# Altium PCB Termo_DISPLAY_CPU_10_1.PcbDoc (part 1 of 2)
Units mil, origin at the board's own origin, x right, y up, seen from the top; angles counter-clockwise.
Board outline 3356.49 x 1466.72 mil, 2 copper layers (Top Layer, Bottom Layer); 43 components, 32 nets, 183 pads, 62 vias.
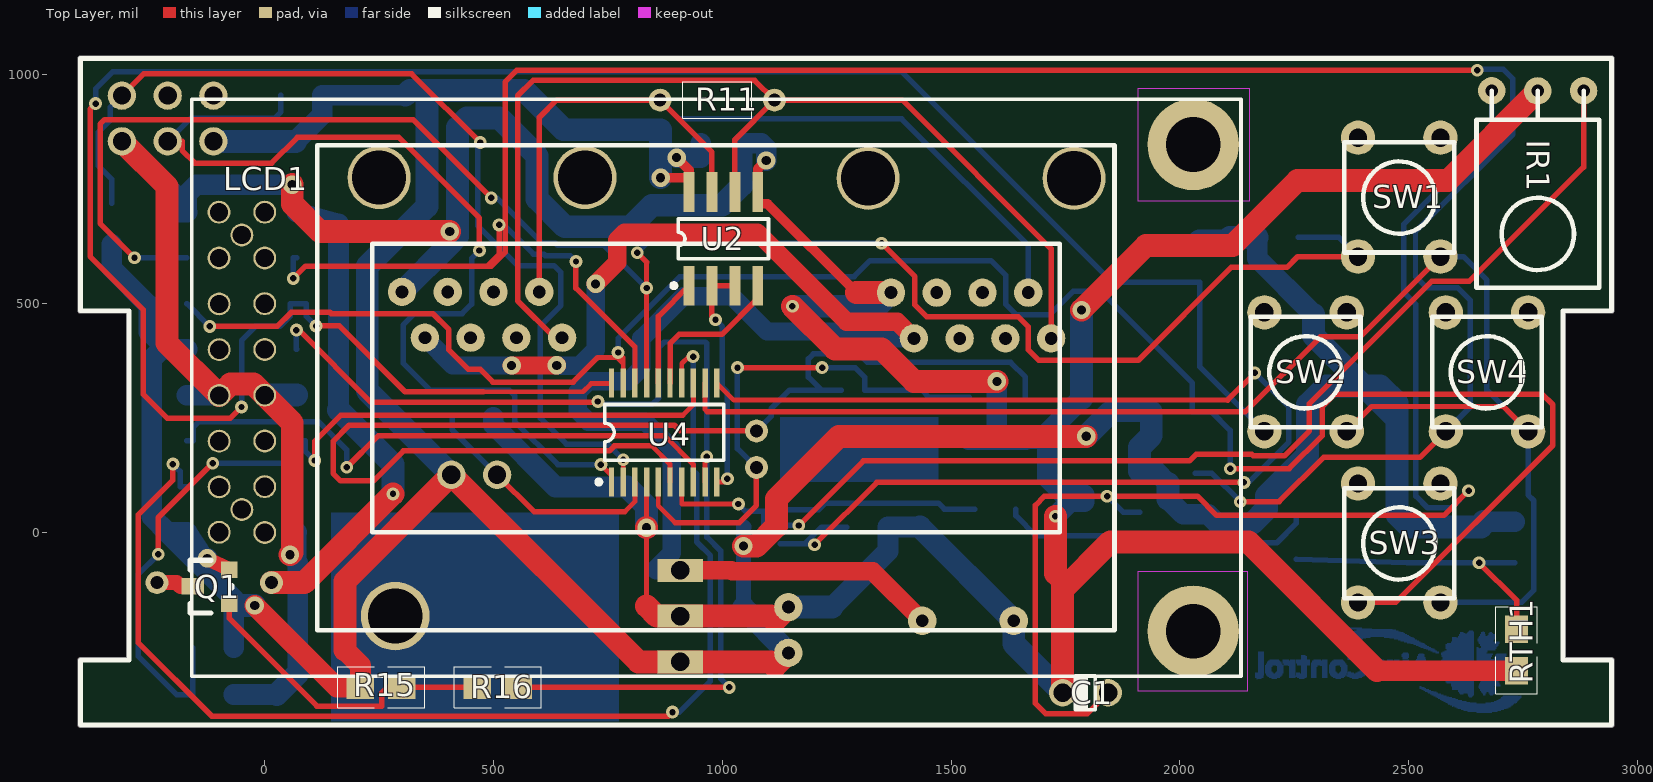
[diagram p0: Top Layer view]
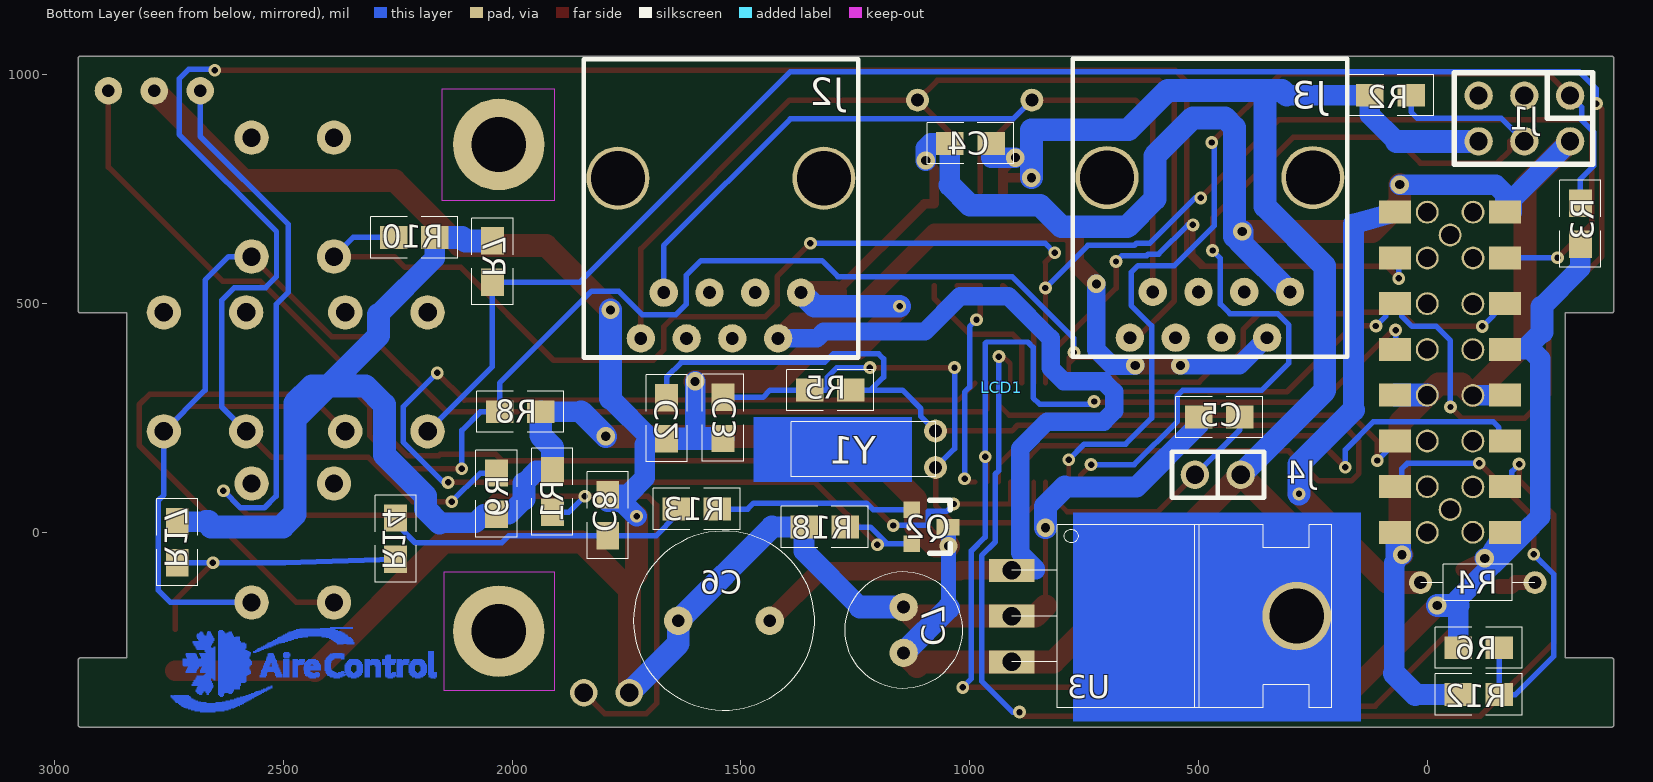
[diagram p1: Bottom Layer view, seen from below]

## Layer stack, top to bottom
Top Layer: signal copper 1.4
Dielectric: dielectric 12.6, FR-4, Dk 4.8
Bottom Layer: signal copper 1.4

## Board outline
-407.76,-420.76 ccw(c-402.75,-420.76) -402.75,-425.78 2943.71,-425.78 ccw(c2943.71,-420.76) 2948.73,-420.76 2948.73,-279.03 ccw(c2943.71,-279.03) 2943.71,-274.01 2842.43,-274.01 2842.43,479.74 2943.71,479.74 ccw(c2943.71,484.75) 2948.73,484.75 2948.73,1035.93 ccw(c2943.71,1035.93) 2943.71,1040.95 -402.75,1040.95 ccw(c-402.75,1035.93) -407.76,1035.93 -407.76,484.75 ccw(c-402.75,484.75) -402.75,479.74 -301.46,479.74 -301.46,-274.01 -402.75,-274.01 ccw(c-402.75,-279.03) -407.76,-279.03

## Design rules (kind name [scope] priority, off if disabled: settings)
Clearance via-via [(IsVia) vs (IsVia)] p1: gap=10
Clearance C_LCD1 [(IsPad AND InComponent('LCD1')) vs (IsPad AND InComponent('LCD1'))] p2: gap=10
Clearance [All] p3: gap=10
FabricationTestPointUsage TestPointUsage [All] p1: valid=0 allowmultiple=FALSE
FabricationTestpoint Testpoint [All] p1: side=3 testpointundercomponent=TRUE minsize=40 maxsize=100 preferedsize=60 minholesize=0 maxholesize=40 preferedholesize=32 testpointgrid=1 allowsidetop=TRUE allowsidebottom=TRUE usegrid=TRUE gridtolerance=0.01
PolygonConnect [All] p1: connectstyle=Relief reliefconductorwidth=10 reliefentries=4 polygonreliefangle="90 Angle"
RoomDefinition Termo_DISPLAY_CPU_01 [InComponentClass('Termo_DISPLAY_CPU_01')] p1: confinementstyle=ConfineIn formatcopy=TRUE lockcomponents=FALSE outline -467.75,-465.76 3087.25,-465.76 3087.25,1074.24 -467.75,1074.24
RoutingCorners [All] p1: cornerstyle=45-Degree minsetback=100 maxsetback=10
RoutingVias V_5V [InNet('+5V')] p1: holewidth=20 width=40 viastyle="Through Hole" minholewidth=20 minwidth=40 maxholewidth=20 maxwidth=40
RoutingVias V_gnd [InNet('GND POWER')] p2: holewidth=20 width=40 viastyle="Through Hole" minholewidth=20 minwidth=40 maxholewidth=20 maxwidth=40
RoutingVias V_19V [InNet('+19V')] p3: holewidth=20 width=40 viastyle="Through Hole" minholewidth=20 minwidth=40 maxholewidth=20 maxwidth=40
RoutingVias [All] p4: holewidth=14 width=28 viastyle="Through Hole" minholewidth=14 minwidth=28 maxholewidth=14 maxwidth=28
SMDNeckDown [All] p1: percent=90.000
SMDToCorner [All] p1: distance=100000
SMDToPlane [All] p1: distance=160000
SilkscreenOverComponentPads [All] p1: minsilkscreentomaskgap=10
SolderMaskExpansion [All] p1: expansion=4
Width W_LCD_bkl [(InNet('NetLCD1_15') OR InNet('NetQ1_CD'))] p1: maxlimit=100 minlimit=10 preferedwidth=50
Width W_LCD [InNet('NetLCD1_15')] p2: maxlimit=100 minlimit=10 preferedwidth=50
Width W_GND [InNet('GND POWER')] p3: maxlimit=100 minlimit=10 preferedwidth=50
Width W_5V [InNet('+5V')] p4: maxlimit=80 minlimit=10 preferedwidth=50
Width W_12V [InNet('+19V')] p5: maxlimit=100 minlimit=10 preferedwidth=40
Width [All] p6: maxlimit=16 minlimit=7 preferedwidth=12
24 further rules are at their usual default settings.

## Classes and differential pairs
pad class U2_pads: U2-1 U2-2 U2-3 U2-4 U2-5 U2-6 U2-7 U2-8 U2-9 U2-10 U2-11 U2-12 U2-13 U2-14 U2-15 U2-16 U2-17 U2-18 U2-19 U2-20 U2-21 U2-22 U2-23 U2-24 U2-25 U2-26 U2-27 U2-28 U2-29 U2-30 U2-31 U2-32 U2-33 U2-34 U2-35 U2-36 U2-37 U2-38 U2-39 U2-40 U2-41 U2-42 U2-43 U2-44 U2-45 U2-46 U2-47 U2-48 U2-49 U2-50 U2-51 U2-52 U2-53 U2-54 U2-55 U2-56 U2-57 U2-58 U2-59 U2-60 U2-61 U2-62 U2-63 U2-64

## Components (designator, comment, footprint, x,y, rotation, side; value= is the part's Value field where it differs from the comment)
C1 "10uT" Dio_4007_Vert 1843.62,-350.39 r180 top
C2 "22p" 0805 1661.42,204.72 r90 bottom
C3 "22p" 0805 1538.37,205.28 r90 bottom
C4 "0.1u" 0805 1043.31,849.39 r180 bottom
C5 "0.1u" 0805 499.45,250.97 r180 bottom
C6 "330/16" 330x16 1537.01,-192.91 r0 bottom
C7 "10/6" 10X16 1144.5,-213.33 r90 bottom
C8 "0.1u" 0805 1790.34,-7.32 r90 bottom
IR1 "IRM8601S" IRM8601S 2916.15,902.07 r180 top
J1 "BDM Port" JBDM -312.2,954.83 r0 bottom
J2 "CON_RJ-45" RJ-45V 1318.91,774.12 r0 bottom locked
J3 "CON_RJ-45" RJ-45V 250.01,775.7 r0 bottom locked
J4 "JMP" JUMP_1 508.37,125.56 r180 bottom
LCD1 "HC200401C-VB" FDC0802B_SSMPTH 0,0 r0 top locked
Q1 "TMS2311P" SOT-23-BM -77.48,-156.11 r90 top
Q2 "BC547C" SOT-23 1127.24,49.81 r270 bottom
R1 "47" 0805 1913.21,134.36 r270 bottom
R2 "4K7" 0805 35.43,956.69 r0 bottom
R3 "4K7" 0805 -333.65,719.92 r270 bottom
R4 "100" SFR16 -235.42,-109.74 r0 bottom
R5 "3M" 0805 1259.84,312.02 r0 bottom
R6 "10K" 0805 -67.48,-252.97 r180 bottom
R7 "33K" 0805 2044.31,637.24 r270 bottom
R8 "33K" 0805 1937.56,264.78 r0 bottom
R9 "33K" 0805 2033.26,39.87 r90 bottom
R10 "33K" 0805 2169.29,645.67 r0 bottom
R11 "600" SFR16 1114.17,944.88 r180 top
R12 "1K" 0805 -67.48,-355.33 r180 bottom
R13 "10K" 0805 1551.73,52.18 r0 bottom
R14 "10K" 0805 2255.91,31.5 r270 bottom
R15 "10K" 0805 209.21,-339.58 r0 top
R16 "1K" 0805 554.57,-337.58 r180 top
R17 "15K" 0805 2731.28,-66.38 r90 bottom
R18 "1K" 0805 1272.21,12.81 r0 bottom
RTH1 "10K" 0805 2735.05,-212.1 r270 top
SW1 "MSW" Switch_1 2479.69,731.86 r0 top
SW2 "MSW" Switch_1 2274.97,349.97 r0 top
SW3 "MSW" Switch_1 2479.69,-24.04 r0 top
SW4 "MSW" Switch_1 2671.51,349.97 r0 top
U2 "SN75176A / DS36277" M08A 1001.87,642.6 r0 top
U3 "LM7805" LM78XX 908.28,-182.96 r270 bottom
U4 "MC9S08SH4 (TSSOP20)" TSSOP20 873.03,218.5 r0 top locked
Y1 "32.768 KHz" X32768 1074.8,222.23 r270 bottom

## Footprints (in the part's own frame and the unit in brackets; to place one, negate y for a bottom-side part, rotate by r counter-clockwise, add the part's x,y. Pads: shape width x height; smd on the part's side, far side on the other; paste and mask are expansions set on the pad)
10X16 [mil]
  round 62 hole 28: 1(-49.95,0) 2(50.05,0)
  silkscreen extent -128,-128 128,128
330x16 [mil]
  round 62 hole 28: 1(-100,0) 2(100,0)
  silkscreen extent -197,-197 197,197
0805 [mil]
  rect 60x50 smd: 1(0,1) 2(90,1)
  silkscreen extent -50,-44 140,46
Dio_4007_Vert [mil]
  round 60 hole 40: 1(0,0) 2(99.53,0)
  silkscreen extent 28,-37 75,37
FDC0802B_SSMPTH [mil]
  round 50 hole 40: 0(-100,600) 0(-100,700) 0(-99.6,0.5) 0(-99.6,99.5) 0(-99.6,199.5) 0(-99.6,299.5) 0(-99.6,399.5) 0(-99.6,499.5) 0(-50,50) 0(-50,650) 0(0,0) 0(0,100) 0(0,200) 0(0,300) 0(0,400) 0(0,500) 0(0,600) 0(0,700)
  round 10 on Top Overlay: 0(-60.19,-216.07) 0(-60.19,847.98)
  rect 240x120 on Mech1: 0(460.4,-134.5) 0(460.4,765.5) 0(1515.4,-134.5) 0(1515.4,765.5)
  round 200 hole 120: 0(2029.38,-216.07) 0(2029.38,847.98)
  rect 70x50 smd far side: 1(70,0) 2(-170,0) 3(70,100) 4(-170,100) 5(70,200) 6(-170,200) 7(70,300) 8(-170,300) 9(70,400) 10(-170,400) 11(70,500) 12(-170,500) 13(70,600) 14(-170,600) 15(70,700) 16(-170,700)
  silkscreen extent -160,-314 2134,946
IRM8601S [mm]
  round 1.524 hole 0.7: 1(0.85,-1.61) 2(3.4,-1.6) 3(5.95,-1.61)
  silkscreen extent -0.01,-1.61 6.8,9.33
JBDM [mil]
  round 62 hole 40: 1(0,0) 2(0,100) 3(100,0) 4(100,100) 5(200,0) 6(200,100)
  silkscreen extent -50,-50 253,150
JUMP_1 [mil]
  round 62 hole 40: 1(0.5,0.42) 2(100.5,0.42)
  silkscreen extent -49,-50 152,50
LM78XX [mil]
  round 150 hole 120: 0(-0.16,623)
  rect 50x100 hole 40: 1(-100,0) 2(100,0) 3(0,0)
  silkscreen extent -200,0 200,700
M08A [mm]
  rect 0.6x2.2 smd: 1(-1.887,-2.622) 2(-0.617,-2.622) 3(0.653,-2.622) 4(1.923,-2.622) 5(1.923,2.578) 6(0.653,2.578) 7(-0.617,2.578) 8(-1.887,2.578)
  silkscreen extent -2.86,-2.75 2.52,1.08
RJ-45V [mil] "Montaje Vertical"
  round 62 hole 28: 1(400,350) 2(350,250) 3(300,350) 4(250,250) 5(200,350) 6(150,250) 7(100,350) 8(50,250)
  round 137.8 hole 118.11: Gnd(0,0) Gnd(450,0)
  silkscreen extent -75,-260 525,392
SFR16 [mil]
  round 50 hole 28: 1(0,0) 2(250,0)
  silkscreen extent 0,-40 250,40
SOT-23 [mil]
  rect 36x36 smd: B(0,0) E(75,0)
  rect 36x50 smd: C(38,80)
  silkscreen extent -20,-5 95,85
SOT-23-BM [mil]
  rect 36x36 smd: BG(0,0) ES(75,0)
  rect 36x50 smd: CD(38,80)
  silkscreen extent -20,-5 95,85
Switch_1 [mil]
  round 75 hole 40: 1(90,-129) 2(-90,-129) 3(-90,131) 4(90,131)
  silkscreen extent -120,-120 120,121
TSSOP20 [mm] "Shrink Small Outline; 20 Leads; Body Width 4.4 mm; Pitch 0.65 mm"
  rect 0.3x1.6 smd: 1(-2.925,-2.75) 2(-2.275,-2.75) 3(-1.625,-2.75) 4(-0.975,-2.75) 5(-0.325,-2.75) 6(0.325,-2.75) 7(0.975,-2.75) 8(1.625,-2.75) 9(2.275,-2.75) 10(2.925,-2.75) 11(2.925,2.75) 12(2.275,2.75) 13(1.625,2.75) 14(0.975,2.75) 15(0.325,2.75) 16(-0.325,2.75) 17(-0.975,2.75) 18(-1.625,2.75) 19(-2.275,2.75) 20(-2.925,2.75)
  silkscreen extent -3.75,-2.87 3.3,1.55
X32768 [mil]
  round 50 hole 28: 1(80.5,0) 2(0.5,0)
  silkscreen extent -19,-315 101,0

## Part data
C1: library part CAPACITOR
C2 C3 C4 C5 C8: library part CAP_MINI_NPOL
C6: library part 330X16
C7: library part 10X16
IR1: "Sensor IR"
J1: library part JBDM
J4: library part JUMP_1
LCD1: library part LCD_2X20_01, "12864"
Q1: library part MOSFET_P
Q2: library part NPN, "NPN Bipolar Transistor"
R1: library part RES1
R2 R3 R4: library part R
R5 RTH1: library part RESISTOR
R6 R7 R8 R9 R10 R11 R12 R13 R14 R15 R16 R17 R18: library part RCHICA
SW1 SW2 SW3 SW4: library part SWITCH_1
U2: library part SN75176A, "Low-Voltage Audio Power Amplifier"
U3: library part LM78XX
U4: library part MC9S08SH8_20
Y1: library part CRYSTAL

## Via types
v1: diameter 28, hole 14, Top Layer to Bottom Layer, 46 vias
v2: diameter 40, hole 20, Top Layer to Bottom Layer, 16 vias

## Nets (pads, with @x,y where several pads share a name; then routed paths per layer and width w, separated by ;. In a path a pad name is that pad's centre, name@x,y a point inside that pad or via, vN(x,y) a via of type N, cw(c..) or ccw(c..) an arc to the next point about the centre after c; other vN are vias at no path point)
+5V: C4.2 C7.1 J1.6 J4.2 LCD1.2 LCD1.10 Q1.ES Q2.C R1.1 R2.2 R3.2 R6.1 R7.1 R8.1 R9.1 R10.1 R15.1 R17.2 U2.8 U3.2 | length 9429.8
  Top Layer w21.26: v2(865.25,775.24) U2.8@927.56,775.24 ; v2(900.25,819.24) 927.56,791.93 U2.8@927.56,775.24 ; U2.8@927.56,744.09 U2.8@927.56,775.24
  Top Layer w32.4: v2(-125.75,-56.76) Q1.ES@-77.48,-81.11
  Top Layer w45: v2(-21.72,-159.76) 157.1,-338.58 R15.1@209.21,-338.58 209.21,-290.76 175.25,-256.8
  Top Layer w50: 175.25,-256.8 175.25,-106.64 J4.2@407.87,125.98 816.82,-282.96 U3.2@908.28,-282.96 1105.25,-282.96 1115.03,-292.74 C7.1@1144.5,-263.28 ; v2(1046.25,-29.76) 1075.25,-29.76 1118.25,13.24 1118.25,73.24 1255.1,210.08 v2(1795.7,210.08)
  Bottom Layer w32.4: 1046.25,-165.04 v2(1046.25,-29.76) 1046.25,11.81 Q2.C@1047.24,11.81
  Bottom Layer w45: R3.2@-334.65,629.92 -334.65,577.24 -250.75,493.34 ; -250.75,438 -212.75,400 ; LCD1.10@-170,400 -212.75,400 ; v2(-125.75,-56.76) -129.69,-60.71 -130.12,-60.15 -132.75,-56.76 LCD1.2@-170,0 -212.75,0 ; R6.1@-67.48,-251.97 -67.48,-159.76 -67.48,-145.27 -212.75,0 ; 67.25,854.83 125.43,913.01 R2.2@125.43,955.69 307.25,955.69 ; v2(900.25,819.24) 953.31,819.24 C4.2@953.31,850.39 ; 1849.4,263.78 R8.1@1937.56,263.78 ; R1.1@1912.21,134.36 1947.25,134.36 1974.06,107.55 ; 1974.06,73.06 2007.25,39.87 R9.1@2034.26,39.87 2061.86,39.87 2080.99,20.74 2159.25,20.74 ; R10.1@2169.29,644.67 2169.29,599.24 2292.25,476.28 ; 2663.92,23.62 2669.64,23.62 R17.2@2732.28,23.62 ; -212.75,0 -247.25,34.5 -247.25,379.24 -226.49,400 -212.75,400
  Bottom Layer w50: -250.75,438 -250.75,493.34 ; J1.6@-112.19,854.83 67.25,854.83 ; -67.48,-159.76 v2(-21.72,-159.76) ; 307.25,955.69 317.8,966.24 354.25,966.24 ; J4.2@407.87,125.98 224.01,309.85 224.01,582 354.25,712.24 354.25,966.24 ; v2(865.25,775.24) 865.25,879.39 864.4,880.24 653.25,880.24 567.25,966.24 354.25,966.24 ; 1046.25,-165.04 C7.1@1144.5,-263.28 ; v2(1795.7,210.08) 1849.4,263.78 ; R1.1@1912.21,134.36 1912.21,186.24 1937.56,211.59 R8.1@1937.56,263.78 ; 1974.06,73.06 1974.06,107.55 ; R7.1@2043.31,637.24 2102.25,637.24 2109.68,644.67 R10.1@2169.29,644.67 ; 2159.25,20.74 2189.25,50.74 2189.25,79.24 2279.47,169.46 2279.47,279.24 2320.47,320.24 2402.25,320.24 ; 2292.25,476.28 2292.25,430.24 2402.25,320.24 ; 2663.92,23.62 2652.76,12.46 2504.98,12.46 2475.2,42.24 2475.2,283.3 2438.25,320.24 2402.25,320.24 ; 2669.64,23.62 2658.25,12.24 2501.25,12.24 2474.25,39.24 2474.25,248.24 2402.25,320.24
+19V: C6.1 J2.7 J3.7 U3.1 | length 3510.7
  Top Layer w40: v2(539.71,364.7) 637.71,364.7 v2(638.25,365.24) ; v2(723.25,543.24) 770.25,590.24 770.25,639.24 786.25,655.24 1077.25,655.24 1271.72,460.78 1382.25,460.78 J2.7@1418.91,424.12 ; U3.1@908.28,-82.96 1019.81,-82.96 1021.6,-84.76 1328.85,-84.76 C6.1@1437.01,-192.91
  Bottom Layer w40: J3.7@350.01,425.7 411.01,364.7 v2(539.71,364.7) ; v2(638.25,365.24) 639.25,364.24 688.25,364.24 723.25,399.24 v2(723.25,543.24) ; U3.1@908.28,-82.96 855.25,-82.96 855.25,-79.47 889.64,-45.08 889.64,183.3 830.7,242.24 707.25,242.24 684.25,265.24 684.25,307.24 707.25,330.24 794.25,330.24 823.25,359.24 823.25,424.24 915.25,516.24 1021.25,516.24 1098.25,439.24 1319.14,439.24 1334.25,424.12 J2.7@1418.91,424.12
"GND POWER": C1.2 C2.1 C3.1 C4.1 C5.1 C6.2 C7.2 C8.2 IR1.2 J1.2 J2.8 J3.8 LCD1.0@0,300 LCD1.0@-99.6,299.5 LCD1.1 LCD1.7 LCD1.8 LCD1.16 R12.1 R18.2 RTH1.2 U2.5 U3.3 U4.4 | length 11017
  Top Layer w10.63: 834.64,-160.76 834.64,10.63 U4.4@834.64,110.24
  Top Layer w21.26: v2(1096.25,812.93) 1077.56,794.24 U2.5@1077.56,744.09 1077.56,718.24 1099.25,718.24 1293.37,524.12
  Top Layer w45: 2431.29,-302.1 RTH1.2@2736.05,-302.1
  Top Layer w50: J1.2@-312.19,854.83 -213.75,756.38 -213.75,413.65 LCD1.0@-99.6,299.5 -74.86,324.23 -24.23,324.23 LCD1.0@0,300 60.25,239.75 60.25,-43.76 v2(55.25,-48.76) ; v2(60.25,760.24) 60.25,718.24 120.94,657.56 v2(404.25,657.56) ; v2(834.25,10.24) v2@834.64,10.63 ; 834.64,-160.76 856.85,-182.96 U3.3@908.28,-182.96 1105.25,-182.96 1115.03,-192.74 C7.2@1144.5,-163.28 ; v1(1153.25,494.24) 1246.25,401.24 1348.25,401.24 1419.25,330.24 v2(1600.25,330.24) ; 1293.37,524.12 J2.8@1368.91,524.12 ; v1(1728.25,35.24) 1728.25,-89.92 1744.09,-105.76 1744.09,-124.92 ; C1.2@1744.09,-350.39 1744.09,-124.92 ; v2(1785.25,486.24) 1926.25,627.24 2115.25,627.24 2257.25,769.24 2586.47,769.24 IR1.2@2782.29,965.07 ; 2431.29,-302.1 2149.86,-20.67 1848.34,-20.67 1744.09,-124.92
  Bottom Layer w45: J1.2@-312.19,854.83 -184.75,727.38 -184.75,700 LCD1.16@-170.75,700 ; LCD1.8@-170,300 -100.1,300 LCD1.0@-99.6,299.5 ; LCD1.16@-170,700 LCD1.16@-170.75,700 ; R12.1@-67.48,-354.33 26.25,-354.33 ; v2(55.25,-48.76) 58.25,-45.76 58.25,0 LCD1.1@69.25,0 ; v2(60.25,760.24) -149.75,760.24 -170.75,739.24 LCD1.16@-170.75,700 ; LCD1.1@70,0 LCD1.1@69.25,0 ; 72.25,-308.33 72.25,-66.76 69.25,-63.76 LCD1.1@69.25,0 ; C5.1@499.45,251.97 499.45,235.24 635.45,99.24 792.25,99.24 ; 1043.31,759.24 C4.1@1043.31,850.39 1085.1,850.39 1096.25,839.24 v2(1096.25,812.93) ; 1239.68,-163.28 1362.2,-40.76 R18.2@1362.2,11.81 1432.28,11.81 ; v2(1600.25,330.24) 1600.25,205.28 C2.1@1662.42,204.72 1697.25,204.72 ; v1(1728.25,35.24) 1760.25,67.24 1791.34,67.24 C8.2@1791.34,82.68 1746.82,82.68 1710.25,119.24 1710.25,191.72 1697.25,204.72 ; 1785.25,292.72 1697.25,204.72
  Bottom Layer w50: LCD1.0@0,300 LCD1.7@70,300 ; 26.25,-354.33 72.25,-308.33 ; J3.8@300.01,525.7 404.25,629.94 ; v2(404.25,657.56) 404.25,629.94 ; 792.25,99.24 834.25,57.24 v2(834.25,10.24) ; 1043.31,759.24 999.31,715.24 846.32,715.24 799.32,668.24 656.04,668.24 595.49,728.79 595.49,823.01 512.25,906.24 442.25,906.24 421.25,885.24 421.25,646.94 404.25,629.94 ; C7.2@1144.5,-163.28 1239.68,-163.28 ; v1(1153.25,494.24) 1339.03,494.24 J2.8@1368.91,524.12 ; 1432.28,11.81 C6.2@1637.01,-192.91 1637.01,-243.31 C1.2@1744.09,-350.39 ; C3.1@1539.37,205.28 1600.25,205.28 1600.81,204.72 C2.1@1662.42,204.72 ; 1785.25,292.72 v2(1785.25,486.24)
NetC1_1: C1.1 IR1.3 R1.2 | length 2819.9
  Top Layer w12: C1.1@1843.62,-350.39 1797.26,-396.76 1707.25,-396.76 1684.25,-373.76 1684.25,59.24 1704.25,79.24 v1(1841.25,79.24) 2038.36,79.24 2080.36,37.24 2577.25,37.24 v1(2631.25,91.24)
  Bottom Layer w12: v1(1841.25,79.24) 1876.14,44.36 R1.2@1912.21,44.36 ; v1(2631.25,91.24) 2593.47,53.46 2542.04,53.46 2516.2,79.3 2516.2,498.44 2489.44,525.2 2489.44,673.12 2681.9,865.58 IR1.3@2681.9,965.46
NetC2_2: C2.2 R5.1 U4.6 Y1.2 | length 2702.4
  Top Layer w10.63: 845.83,189.24 885.83,149.24 U4.6@885.83,110.24
  Top Layer w12: 845.83,189.24 764.44,189.24 753.44,178.24 303.25,178.24 237.47,112.46 166.03,112.46 149.25,129.24 149.25,199.24 184.25,234.24 895.25,234.24 907.76,221.73 Y1.2@1074.8,221.73
  Bottom Layer w12: Y1.2@1074.8,221.73 1106.59,253.52 1106.59,270.36 1147.25,311.02 1216.47,311.02 ; R5.1@1259.84,311.02 1216.47,311.02 ; C2.2@1662.42,294.72 1662.42,339.49 1630.14,371.77 1317.17,371.77 1298.7,390.24 1199.25,390.24 1188.25,379.24 1188.25,339.24 1216.47,311.02
NetC3_2: C3.2 R5.2 U4.5 Y1.1 | length 1165.3
  Top Layer w10.63: U4.5@860.23,110.24 860.23,58.38 897.14,21.48
  Top Layer w12: 897.14,21.48 1037.37,21.48 1074.8,58.91 Y1.1@1074.8,141.73 ; v1(1033.25,360.24) v1(1218.25,360.24)
  Bottom Layer w12: v1(1033.25,360.24) 1033.25,183.28 Y1.1@1074.8,141.73 ; v1(1218.25,360.24) 1290.25,360.24 1311.25,339.24 1311.25,311.02 R5.2@1349.84,311.02 1436.25,311.02 1452,295.28 C3.2@1539.37,295.28
NetC5_2: C5.2 J4.1 U4.3 | length 553.6
  Top Layer w10.63: 787.25,45.24 809.05,67.04 U4.3@809.05,110.24
  Top Layer w12: J4.1@507.87,125.98 588.62,45.24 787.25,45.24
  Bottom Layer w12: C5.2@409.45,251.97 409.45,224.41 J4.1@507.87,125.98
NetC8_1: C8.1 R13.2 R14.1 | length 681.5
  Bottom Layer w12: R13.2@1641.73,51.18 1641.73,36.62 1685.67,-7.32 C8.1@1791.34,-7.32 2007.92,-7.32 2023.36,-22.76 2212.01,-22.76 2254.9,20.13 R14.1@2254.9,31.5
NetIR1_1: IR1.1 U4.7 | length 2586.3
  Top Layer w10.63: U4.7@911.42,110.24 911.42,62.24 v1(1035.25,62.24)
  Top Layer w12: v1(1167.25,15.24) 1308.25,156.24 2021.24,156.24 2036.25,171.25 2157.04,171.25 2161.05,167.24 2228.47,167.24 2283.25,222.02 2283.25,281.47 2551.02,549.24 2633.25,549.24 2882.69,798.67 IR1.1@2882.69,965.46
  Bottom Layer w12: v1(1035.25,62.24) 1051.25,46.24 1090.25,46.24 1090.25,15.24 v1(1167.25,15.24)
NetJ1_1: J1.1 R3.1 U4.2 | length 2146.6
  Top Layer w10.63: U4.2@783.46,110.24 v1(783.46,159.03)
  Top Layer w12: J1.1@-312.19,954.83 -264.78,1002.24 321.25,1002.24 v1(471.25,852.24)
  Bottom Layer w12: R3.1@-334.65,719.92 -334.65,772.24 -363.75,801.34 -363.75,874.89 -338.1,900.53 -338.1,928.92 J1.1@-312.19,954.83 ; v1(471.25,852.24) 465.25,846.24 465.25,670.79 552.8,583.24 632.25,583.24 647.25,568.24 647.25,496.24 602.25,451.24 602.25,249.79 659.25,192.79 749.7,192.79 v1(783.46,159.03)
NetJ1_4: J1.4 R2.1 U4.1 | length 2171.7
  Top Layer w10.63: v1(734.87,148.24) 757.87,125.24 U4.1@757.87,110.24
  Top Layer w12: J1.4@-212.19,854.83 -180.75,854.83 -180.75,835.24 -152.75,807.24 15.25,807.24 71.25,863.24 293.25,863.24 469.25,687.24 v1(469.25,616.24)
  Bottom Layer w12: J1.4@-212.19,854.83 -161.78,905.24 21.43,905.24 35.43,919.24 R2.1@35.43,955.69 ; v1(469.25,616.24) 452.25,599.24 452.25,499.24 431.25,478.24 327.25,478.24 302.25,453.24 302.25,370.24 361.25,311.24 534.25,311.24 546.25,299.24 546.25,242.88 640.9,148.24 v1(734.87,148.24)
NetJ2_1: J2.1 J3.1 R11.1 U2.6 | length 2343.4
  Top Layer w12: J3.1@650.01,425.7 633.54,425.7 553.01,506.23 553.01,954.58 586.61,988.19 1070.87,988.19 R11.1@1114.17,944.88 ; U2.6@1027.56,744.09 1027.56,858.27 R11.1@1114.17,944.88 ; J2.1@1718.91,424.12 1718.91,619.67 1393.7,944.88 R11.1@1114.17,944.88
NetJ2_2: J2.2 J3.2 R11.2 U2.7 | length 1948.3
  Top Layer w12: J3.2@600.01,525.7 600.01,907.1 637.8,944.88 R11.2@864.17,944.88 977.56,831.5 U2.7@977.56,744.09
  Bottom Layer w12: R11.2@864.17,944.88 905.17,903.88 1392.07,903.88 1668.91,627.05 J2.2@1668.91,524.12
NetLCD1_3: LCD1.3 R6.2 R12.2 | length 973.5
  Top Layer w12: v1(-232.75,-47.76) -232.75,32.24 v1(-113.75,151.24)
  Bottom Layer w12: v1(-232.75,-47.76) -276.75,-91.76 -276.75,-270.33 -192.75,-354.33 R12.2@-157.48,-354.33 R6.2@-157.48,-251.97 ; v1(-113.75,151.24) 43.25,151.24 55.25,139.24 55.25,100 LCD1.3@70,100
NetLCD1_4: LCD1.4 U4.14 | length 2640
  Top Layer w10.63: U4.14@911.42,326.77 911.42,369.24 926.42,384.24 v1(936.25,384.24)
  Top Layer w12: v1(-200.75,149.24) -200.75,114.24 -276.75,38.24 -276.75,-240.76 -115.75,-401.76 882.25,-401.76 v1(891.25,-392.76)
  Bottom Layer w12: v1(-200.75,149.24) -184.75,133.24 -184.75,100 LCD1.4@-170,100 ; v1(891.25,-392.76) 906.28,-392.76 974.28,-324.76 974.28,-50.78 944.25,-20.76 944.25,127.24 936.25,135.24 v1(936.25,384.24)
NetLCD1_5: LCD1.5 U4.13 | length 1020.1
  Top Layer w10.63: 914.01,256.24 937.01,279.24 U4.13@937.01,326.77
  Top Layer w12: v1(109.25,157.24) 109.25,199.24 166.25,256.24 914.01,256.24
  Bottom Layer w12: LCD1.5@70,200 88.25,200 88.25,178.24 v1(109.25,157.24)
NetLCD1_6: LCD1.6 U4.8 | length 1298.1
  Top Layer w10.63: 874.25,211.24 937.01,148.49 U4.8@937.01,110.24
  Top Layer w12: v1(179.25,142.46) 248.03,211.24 874.25,211.24
  Bottom Layer w12: LCD1.6@-170,200 -156.75,200 -156.75,229.24 -143.75,242.24 117.67,242.24 179.25,180.65 v1(179.25,142.46)
NetLCD1_9: LCD1.9 R16.1 U4.9 | length 2423.8
  Top Layer w10.63: U4.9@962.6,110.24 962.6,161.58 v1(966.25,165.24)
  Top Layer w12: v1(69.25,442.24) 74.69,442.24 232.69,284.24 726.25,284.24 v1(728.25,286.24) ; R16.1@554.57,-338.58 1015.08,-338.58 v1(1015.25,-338.76)
  Bottom Layer w12: v1(69.25,442.24) 69.25,400 LCD1.9@70,400 ; v1(728.25,286.24) 728.25,280.24 847.25,280.24 861.25,294.24 861.25,404.24 873.25,416.24 963.25,416.24 966.25,413.24 v1(966.25,165.24) 966.25,-10.04 996.28,-40.06 996.28,-319.78 v1(1015.25,-338.76)
NetLCD1_11: LCD1.11 R7.2 SW2.2 U4.20 | length 5079.9
  Top Layer w10.63: 477.44,307.38 695.57,307.38 713.43,325.24 757.87,325.24 U4.20@757.87,326.77
  Top Layer w12: v1(-369.75,937.24) -381.75,925.24 -381.75,603.24 -265.75,487.24 -265.75,302.24 -212.75,249.24 -75.75,249.24 v1(-50.75,274.24) ; v1(112.25,451.24) 163.25,451.24 307.11,307.38 477.44,307.38
  Bottom Layer w12: v1(-369.75,937.24) -369.75,969.24 -331.75,1007.24 1392.25,1007.24 1852.25,547.24 R7.2@2043.31,547.24 2043.31,362.63 SW2.2@2184.97,220.97 ; v1(-50.75,274.24) -50.75,419.24 -19.75,450.24 33.25,450.24 55.25,472.24 55.25,500 LCD1.11@70,500 91.25,500 91.25,472.24 v1(112.25,451.24)
NetLCD1_12: LCD1.12 R8.2 SW3.2 U4.19 | length 4442.9
  Top Layer w10.63: 727.59,382.03 770.67,382.03 783.46,369.24 ; v1(772.25,393.24) 783.46,382.03 783.46,369.24 ; U4.19@783.46,326.77 783.46,369.24
  Top Layer w12: v1(-120.24,450.24) 27.25,450.24 58.27,481.25 142.25,481.25 145.27,478.24 367.25,478.24 402.25,443.24 402.25,399.24 445.25,356.24 471.21,356.24 498.75,328.7 674.25,328.7 727.59,382.03 ; v1(2110.25,139.24) 2239.25,139.24 2311.25,211.24 2311.25,274.24 2339.25,302.24 2792.25,302.24 2815.25,279.24 2815.25,190.24 2471.97,-153.04 SW3.2@2389.7,-153.04
  Bottom Layer w12: LCD1.12@-170,500 v1(-120.24,450.24) ; v1(772.25,393.24) 772.25,424.24 907.25,559.24 1288.25,559.24 1323.25,594.24 1587.25,594.24 1619.25,562.24 1619.25,499.24 1642.25,476.24 1716.25,476.24 1767.25,527.24 1826.56,527.24 2027.56,326.24 R8.2@2027.56,263.78 2069.71,263.78 2110.25,223.24 v1(2110.25,139.24)
NetLCD1_13: LCD1.13 R9.2 SW4.2 U4.18 | length 5361.8
  Top Layer w10.63: U4.18@809.05,326.77 809.05,405.44
  Top Layer w12: v1(62.25,555.24) 89.25,582.24 487.25,582.24 ; v1(512.14,672.13) 512.14,607.13 487.25,582.24 ; v1(680.25,592.24) 680.25,534.24 809.05,405.44 ; v1(2132.25,67.24) 2217.25,67.24 2314.25,164.24 2524.77,164.24 SW4.2@2581.51,220.97 ; v1(2650.25,1010.24) 551.25,1010.24 525.25,984.24 525.25,612.24 495.25,582.24 487.25,582.24
  Bottom Layer w12: v1(62.25,555.24) 62.25,600 LCD1.13@70,600 ; v1(512.14,672.13) 523.25,672.13 587.14,608.24 610.25,608.24 613.25,605.24 667.25,605.24 v1(680.25,592.24) ; R9.2@2034.26,129.87 2069.62,129.87 v1(2132.25,67.24) ; SW4.2@2581.51,220.97 2635.25,274.72 2635.25,507.24 2607.25,535.24 2539.25,535.24 2515.25,559.24 2515.25,657.24 2728.25,870.24 2728.25,991.24 2707.25,1012.24 2652.25,1012.24 v1(2650.25,1010.24)
NetLCD1_14: LCD1.14 R10.2 SW1.2 U4.17 | length 4079.2
  Top Layer w10.63: U4.17@834.64,326.77 v1(834.64,534.24) 834.64,590.85
  Top Layer w12: v1(-284.75,600.24) -359.75,675.24 -359.75,892.24 -349.75,902.24 324.25,902.24 v1(495.25,731.24) ; v1(814.25,611.24) 834.64,590.85 ; v1(1348.25,632.24) 1421.25,559.24 1421.25,497.24 1447.25,471.24 1647.25,471.24 1669.25,449.24 1669.25,399.24 1692.25,376.24 1909.25,376.24 2112.25,579.24 2234.25,579.24 2257.88,602.86 SW1.2@2389.7,602.86
  Bottom Layer w12: v1(-284.75,600.24) -284.51,600 LCD1.14@-170,600 ; v1(495.25,731.24) 507.25,731.24 606.25,632.24 635.25,632.24 640.25,627.24 741.64,627.24 v1(834.64,534.24) ; v1(814.25,611.24) 835.25,632.24 v1(1348.25,632.24) ; R10.2@2259.29,644.67 2347.89,644.67 SW1.2@2389.7,602.86
NetLCD1_15: LCD1.15 R4.2 | length 1080.1
  Top Layer w50: R4.2@14.58,-109.74 86.28,-109.74 v1(280.25,84.24)
  Bottom Layer w45: LCD1.15@70,700 161.25,674.24 161.25,267.92
  Bottom Layer w50: 161.25,267.92 280.25,148.92 v1(280.25,84.24)
NetQ1_BG: Q1.BG R15.2 R16.2 | length 687.3
  Top Layer w12: Q1.BG@-77.48,-156.11 -77.48,-188.03 114.08,-379.58 255.25,-379.58 255.25,-350.58 267.25,-338.58 R15.2@299.21,-338.58 R16.2@464.57,-338.58
NetQ1_CD: Q1.CD R4.1 | length 81.4
  Top Layer w32.4: R4.1@-235.42,-109.74 -192.37,-109.74 -184,-118.11 Q1.CD@-157.48,-118.11
NetQ2_B: Q2.B R13.1 | length 435.9
  Bottom Layer w12: Q2.B@1127.24,49.81 1211.25,49.81 1225.68,64.24 1472.25,64.24 1485.31,51.18 R13.1@1551.73,51.18
NetQ2_E: Q2.E R18.1 U4.11 | length 2710.3
  Top Layer w10.63: U4.11@988.19,326.77 988.19,326.24 1025.19,289.24 2104.47,289.24
  Top Layer w12: v1(1201.83,-26.76) 1337.83,109.24 v1(2140.25,109.24) ; 2104.47,289.24 v1(2163.97,348.74)
  Bottom Layer w12: Q2.E@1127.24,-25.19 1180.25,-25.19 ; v1(1201.83,-26.76) 1200.25,-25.19 1180.25,-25.19 ; R18.1@1272.2,11.81 1217.25,11.81 1180.25,-25.19 ; v1(2140.25,109.24) 2149.95,109.24 2238.47,197.76 2238.47,274.24 v1(2163.97,348.74)
NetR14_2: R14.2 R17.1 RTH1.1 | length 657.1
  Top Layer w12: v1(2654.25,-66.38) 2736.05,-148.17 RTH1.1@2736.05,-212.1
  Bottom Layer w12: R14.2@2254.9,-58.5 2497.13,-66.38 v1(2654.25,-66.38) R17.1@2732.28,-66.38
NetSW1_1: SW1.1 SW2.1 SW3.1 SW4.1 U4.12 | length 3308.8
  Top Layer w10.63: U4.12@962.6,326.77 962.6,268.24 967.6,263.24
  Top Layer w12: 967.6,263.24 2143.02,263.24 2307.25,427.47 2394.31,427.47 SW1.1@2569.7,602.86 ; SW2.1@2364.97,220.97 2419.24,275.24 2707.24,275.24 SW4.1@2761.51,220.97
  Bottom Layer w12: SW3.1@2569.7,-153.04 2747.25,-153.04 2774.25,-126.04 2774.25,69.24 2761.51,81.99 SW4.1@2761.51,220.97 2671.25,311.22 2671.25,551.69 2620.08,602.86 SW1.1@2569.7,602.86
NetU2_1: U2.1 U4.16 | length 240.5
  Top Layer w12: U4.16@860.23,326.77 860.23,472.05 U2.1@927.56,539.37
NetU2_2: U2.2 U2.3 U4.10 | length 512.1
  Top Layer w10.63: U4.10@988.19,110.24 1004.25,110.24 v1(1011.25,117.24)
  Top Layer w12: v1(985.25,464.85) 977.56,472.55 U2.2@977.56,539.37 U2.3@1027.56,539.37
  Bottom Layer w12: v1(985.25,464.85) 1000.31,449.79 1000.31,317.76 1011.25,306.82 v1(1011.25,117.24)
NetU2_4: U2.4 U4.15 | length 346.8
  Top Layer w12: U4.15@885.83,326.77 885.83,413.39 905.51,433.07 999,433.07 1077.56,511.63 U2.4@1077.56,539.37
pads on no net: J1.3 J1.5 J2.3 J2.4 J2.5 J2.6 J2.Gnd J3.3 J3.4 J3.5 J3.6 J3.Gnd LCD1.0@0,0 LCD1.0@0,100 LCD1.0@0,200 LCD1.0@0,400 LCD1.0@0,500 LCD1.0@0,600 LCD1.0@0,700 LCD1.0@460.4,765.5 LCD1.0@460.4,-134.5 LCD1.0@1515.4,765.5 LCD1.0@1515.4,-134.5 LCD1.0@2029.38,847.98 LCD1.0@2029.38,-216.07 LCD1.0@-50,50 LCD1.0@-50,650 LCD1.0@-60.19,847.98 LCD1.0@-60.19,-216.07 LCD1.0@-99.6,0.5 LCD1.0@-99.6,99.5 LCD1.0@-99.6,199.5 LCD1.0@-99.6,399.5 LCD1.0@-99.6,499.5 LCD1.0@-100,600 LCD1.0@-100,700 SW1.3 SW1.4 SW2.3 SW2.4 SW3.3 SW3.4 SW4.3 SW4.4 U3.0